# EAGLE board SSCI_SPI_LCD_P (EAGLE 7.5.0)
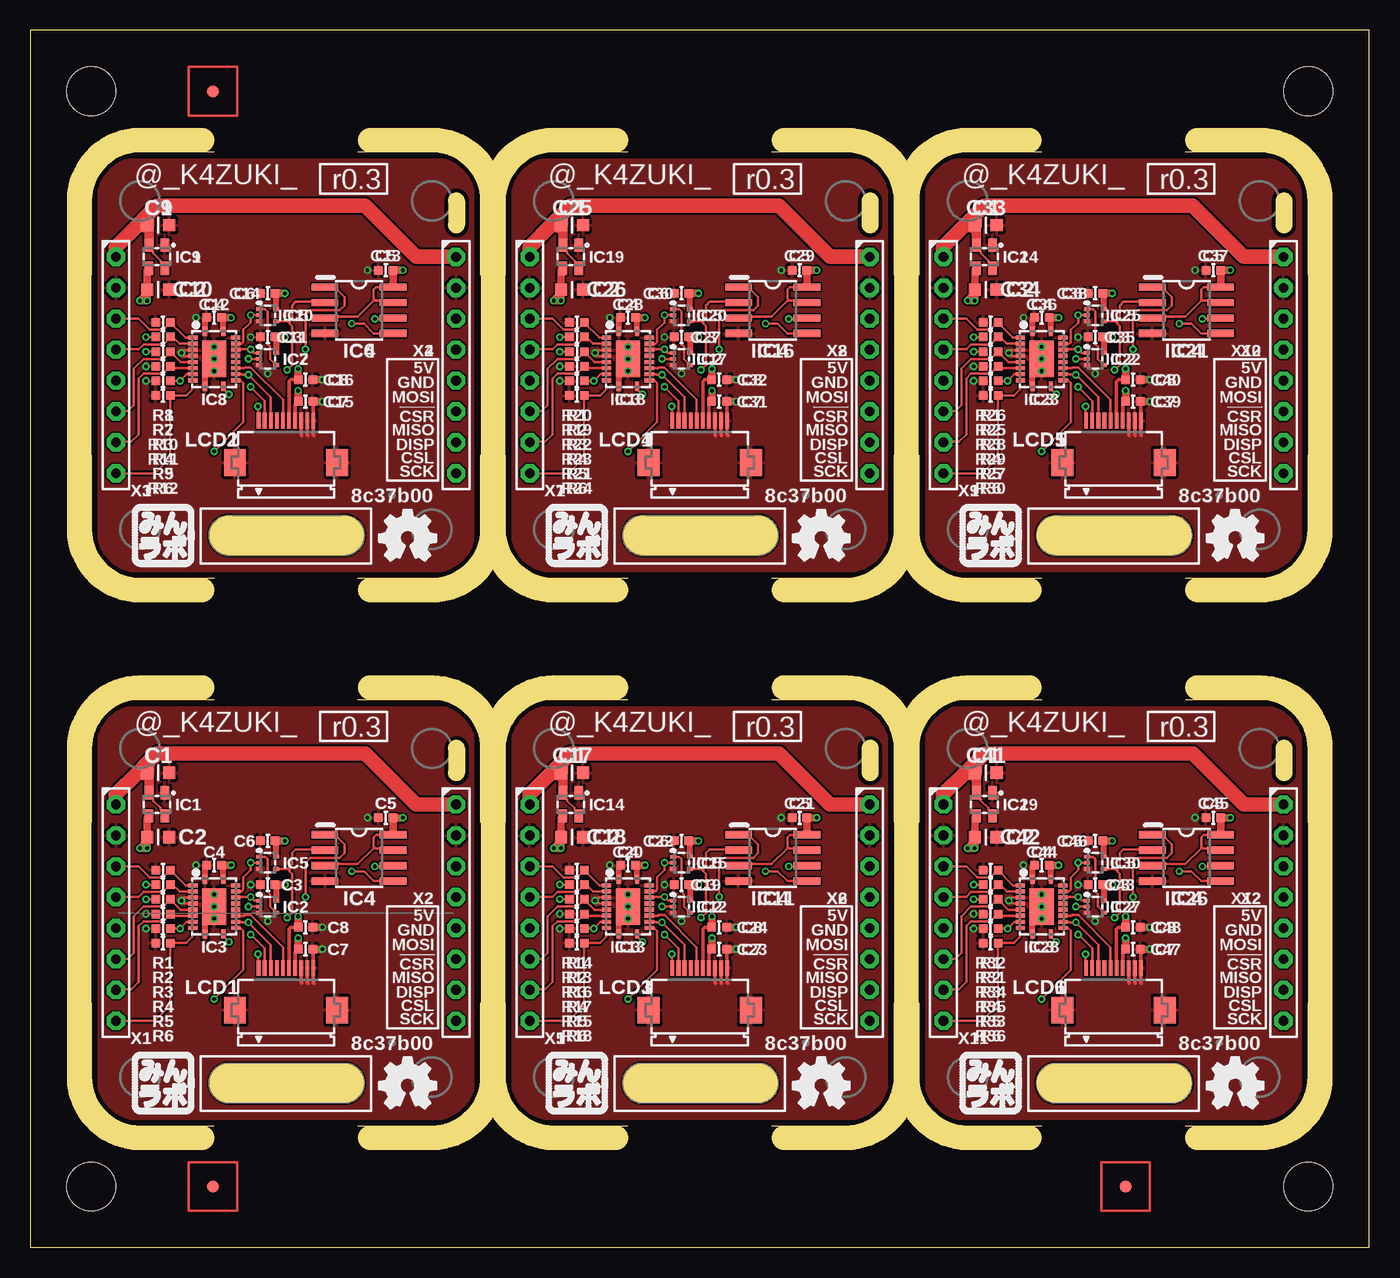
[diagram p0: board, top side]
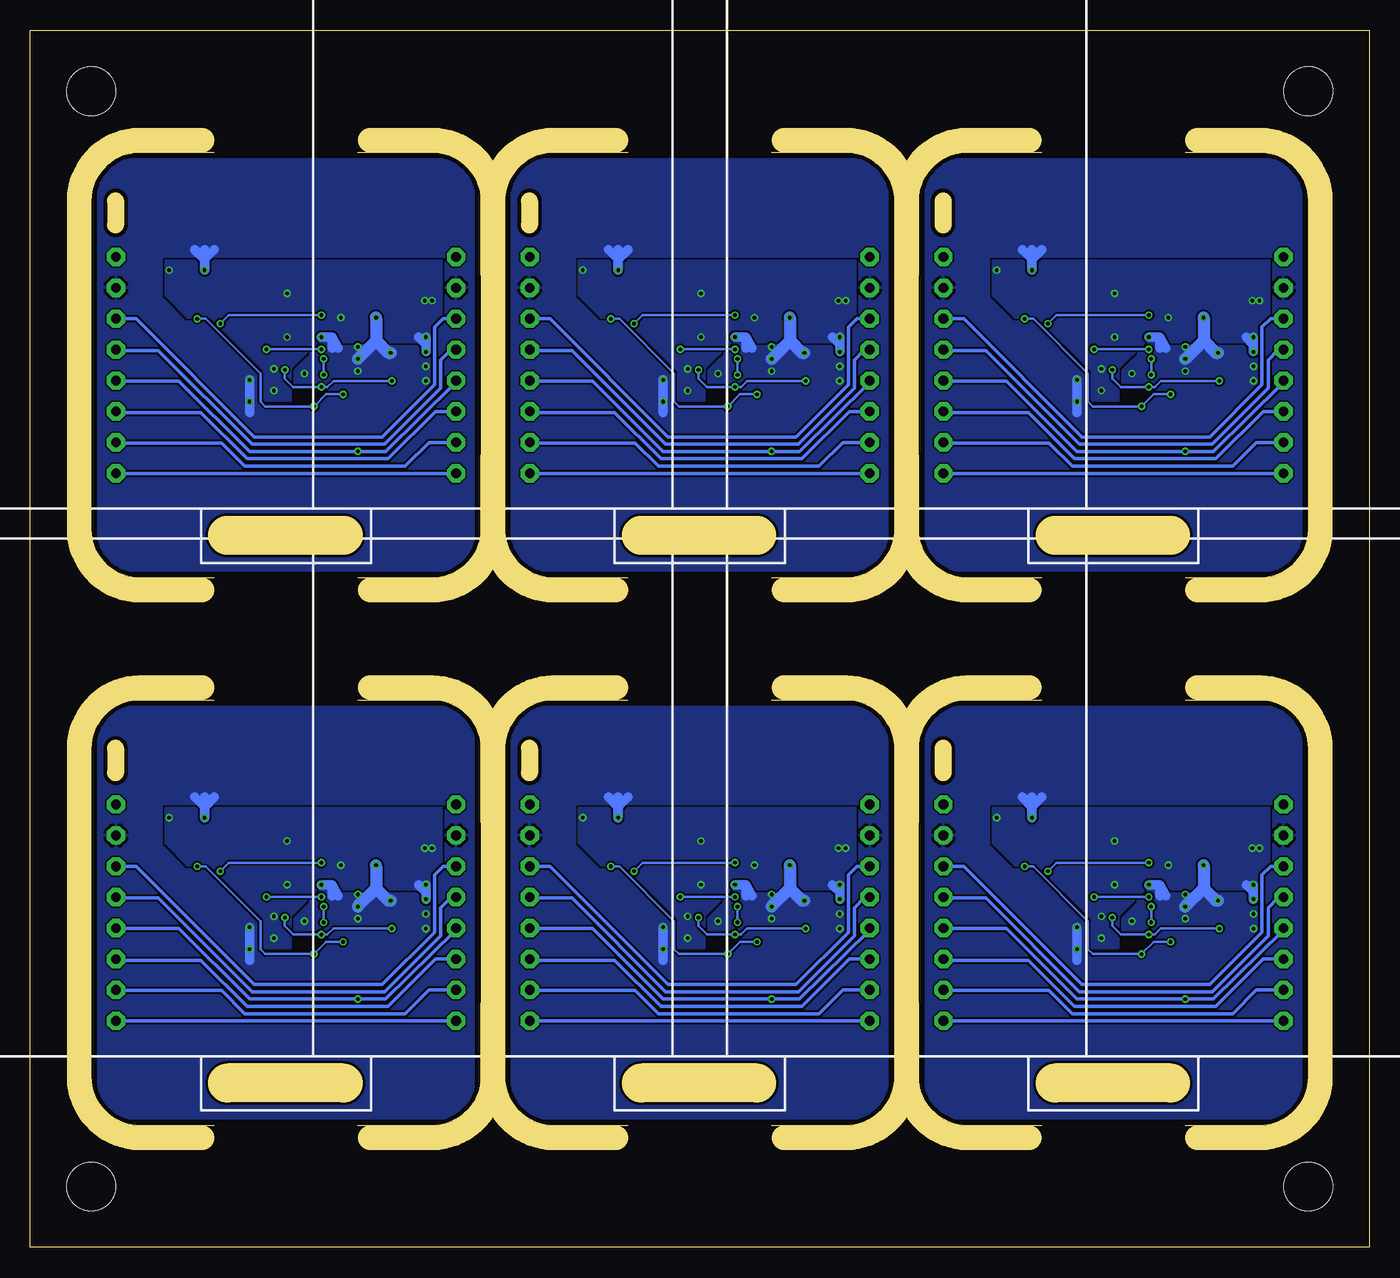
[diagram p1: board, bottom side, seen from below]

Size 110 x 100 mm. Coordinates in mm from the lower left corner, seen from the top.
Outline: 0,0 110,0 110,100 0,100 0,0
Copper layers (1*16): Top 0.035mm / dielectric 1.5mm / Bottom 0.035mm
Design rules "default": minimum track width 0.15mm, minimum drill 0.3mm, track to track 0.15mm, track to pad 0.15mm, pad to pad 0.15mm, via to via 0.15mm, smd to smd 0mil, copper to edge 0.4mm, drill to drill 8mil, minimum pad ring 0.15mm, minimum via ring 0.15mm, stop-mask expansion 4mil, vias tented up to drill 100mil, thermal gap 10mil
Holes 4 mm at 5,5 105,5 105,95 5,95
tRestrict: 108 lines
bRestrict: 30 lines
Milling: 14 lines

## Footprints (pad centres in the part's own frame; a part is rotated, then mirrored left to right if it is on the bottom)
CR_1608 = smd 1 x 1: 1 -0.9,0; 2 0.9,0
C0402 = smd 0.7 x 0.7: 1 -0.6,0; 2 0.6,0
SOT130P220X135-4N = smd 0.7 x 1.1: 1 -0.65,-0.95; 2 0.65,-0.95; 3 0.65,0.95; 4 -0.65,0.95
SOT50P160X120-5N = smd 0.3 x 0.5: 1 -0.5,-0.7; 2 0,-0.7; 3 0.5,-0.7; 4 0.5,0.7; 5 -0.5,0.7
QFN50P460X360-20N = smd 0.75 x 0.35: 1 -2.25,-0.75; 10 2.25,-0.75; 11 2.25,0.75; 20 -2.25,0.75 | smd 0.35 x 0.75: 2 -1.75,-1.75; 3 -1.25,-1.75; 4 -0.75,-1.75; 5 -0.25,-1.75; 6 0.25,-1.75; 7 0.75,-1.75; 8 1.25,-1.75; 9 1.75,-1.75; 12 1.75,1.75; 13 1.25,1.75; 14 0.75,1.75; 15 0.25,1.75; 16 -0.25,1.75; 17 -0.75,1.75; 18 -1.25,1.75; 19 -1.75,1.75 | smd 3 x 2: EP 0,0
IC_08_1.27_150MIL = smd 0.6 x 2.2: 1 -1.905,-2.8; 2 -0.635,-2.8; 3 0.635,-2.8; 4 1.905,-2.8; 5 1.905,2.8; 6 0.635,2.8; 7 -0.635,2.8 | smd 0.603 x 2.2: 8 -1.905,2.8
LCD_GLCD_400X240 = smd 0.3 x 1.3: 1 -2.25,3.45; 2 -1.75,3.45; 3 -1.25,3.45; 4 -0.75,3.45; 5 -0.25,3.45; 6 0.25,3.45; 7 0.75,3.45; 8 1.25,3.45; 9 1.75,3.45; 10 2.25,3.45 | smd 1.8 x 2.2: PAD1 4.2,0; PAD2 -4.2,0
FIDUCIAL = smd 1 x 1: TP 0,0
PHA-1X08SG = drill 0.8 pad 1.5 octagon: 1 8.89,0; 2 6.35,0; 3 3.81,0; 4 1.27,0; 5 -1.27,0; 6 -3.81,0; 7 -6.35,0; 8 -8.89,0

## Placement (x,y rotation side)
C1  [CR_1608]  10.5,39 0 top
C2  [CR_1608]  10.5,33.7 0 top
C3  [C0402]  19.5,29.8 180 top
C4  [C0402]  15.1,31.4 180 top
C5  [C0402]  29.2,35.3 180 top
C6  [C0402]  19.5,33.4 180 top
C7  [C0402]  22.6,24.5 0 top
C8  [C0402]  22.6,26.3 0 top
C9  [CR_1608]  10.5,84 0 top
C10  [CR_1608]  10.5,78.7 0 top
C11  [C0402]  19.5,74.8 180 top
C12  [C0402]  15.1,76.4 180 top
C13  [C0402]  29.2,80.3 180 top
C14  [C0402]  19.5,78.4 180 top
C15  [C0402]  22.6,69.5 0 top
C16  [C0402]  22.6,71.3 0 top
C17  [CR_1608]  44.5,39 0 top
C18  [CR_1608]  44.5,33.7 0 top
C19  [C0402]  53.5,29.8 180 top
C20  [C0402]  49.1,31.4 180 top
C21  [C0402]  63.2,35.3 180 top
C22  [C0402]  53.5,33.4 180 top
C23  [C0402]  56.6,24.5 0 top
C24  [C0402]  56.6,26.3 0 top
C25  [CR_1608]  44.5,84 0 top
C26  [CR_1608]  44.5,78.7 0 top
C27  [C0402]  53.5,74.8 180 top
C28  [C0402]  49.1,76.4 180 top
C29  [C0402]  63.2,80.3 180 top
C30  [C0402]  53.5,78.4 180 top
C31  [C0402]  56.6,69.5 0 top
C32  [C0402]  56.6,71.3 0 top
C33  [CR_1608]  78.5,84 0 top
C34  [CR_1608]  78.5,78.7 0 top
C35  [C0402]  87.5,74.8 180 top
C36  [C0402]  83.1,76.4 180 top
C37  [C0402]  97.2,80.3 180 top
C38  [C0402]  87.5,78.4 180 top
C39  [C0402]  90.6,69.5 0 top
C40  [C0402]  90.6,71.3 0 top
C41  [CR_1608]  78.5,39 0 top
C42  [CR_1608]  78.5,33.7 0 top
C43  [C0402]  87.5,29.8 180 top
C44  [C0402]  83.1,31.4 180 top
C45  [C0402]  97.2,35.3 180 top
C46  [C0402]  87.5,33.4 180 top
C47  [C0402]  90.6,24.5 0 top
C48  [C0402]  90.6,26.3 0 top
GIT1  8c37b00  [GIT-REVISION_1.2]  29.7,16.8 0 top
GIT2  8c37b00  [GIT-REVISION_1.2]  29.7,61.8 0 top
GIT3  8c37b00  [GIT-REVISION_1.2]  63.7,16.8 0 top
GIT4  8c37b00  [GIT-REVISION_1.2]  63.7,61.8 0 top
GIT5  8c37b00  [GIT-REVISION_1.2]  97.7,61.8 0 top
GIT6  8c37b00  [GIT-REVISION_1.2]  97.7,16.8 0 top
I1  [ICON_MINLAB_5.2MM]  8.4,11 0 top
I2  [ICON_MINLAB_5.2MM]  8.4,56 0 top
I3  [ICON_MINLAB_5.2MM]  42.4,11 0 top
I4  [ICON_MINLAB_5.2MM]  42.4,56 0 top
I5  [ICON_MINLAB_5.2MM]  76.4,56 0 top
I6  [ICON_MINLAB_5.2MM]  76.4,11 0 top
IC1  [SOT130P220X135-4N]  10.4,36.4 180 top
IC2  [SOT50P160X120-5N]  19.5,28 270 top
IC3  74LVC541_RGY  [QFN50P460X360-20N]  15.1,28 270 top
IC4  [IC_08_1.27_150MIL]  27,32 270 top
IC5  [SOT50P160X120-5N]  19.5,31.6 270 top
IC6  [IC_08_1.27_150MIL]  27,77 270 top
IC7  [SOT50P160X120-5N]  19.5,73 270 top
IC8  74LVC541_RGY  [QFN50P460X360-20N]  15.1,73 270 top
IC9  [SOT130P220X135-4N]  10.4,81.4 180 top
IC10  [SOT50P160X120-5N]  19.5,76.6 270 top
IC11  [IC_08_1.27_150MIL]  61,32 270 top
IC12  [SOT50P160X120-5N]  53.5,28 270 top
IC13  74LVC541_RGY  [QFN50P460X360-20N]  49.1,28 270 top
IC14  [SOT130P220X135-4N]  44.4,36.4 180 top
IC15  [SOT50P160X120-5N]  53.5,31.6 270 top
IC16  [IC_08_1.27_150MIL]  61,77 270 top
IC17  [SOT50P160X120-5N]  53.5,73 270 top
IC18  74LVC541_RGY  [QFN50P460X360-20N]  49.1,73 270 top
IC19  [SOT130P220X135-4N]  44.4,81.4 180 top
IC20  [SOT50P160X120-5N]  53.5,76.6 270 top
IC21  [IC_08_1.27_150MIL]  95,77 270 top
IC22  [SOT50P160X120-5N]  87.5,73 270 top
IC23  74LVC541_RGY  [QFN50P460X360-20N]  83.1,73 270 top
IC24  [SOT130P220X135-4N]  78.4,81.4 180 top
IC25  [SOT50P160X120-5N]  87.5,76.6 270 top
IC26  [IC_08_1.27_150MIL]  95,32 270 top
IC27  [SOT50P160X120-5N]  87.5,28 270 top
IC28  74LVC541_RGY  [QFN50P460X360-20N]  83.1,28 270 top
IC29  [SOT130P220X135-4N]  78.4,36.4 180 top
IC30  [SOT50P160X120-5N]  87.5,31.6 270 top
ICON1  r0.3  [ICON_REVISION1.7]  26.9,42.8 0 top
ICON2  [ICON_OSHW]  31,13.3 0 top
ICON3  r0.3  [ICON_REVISION1.7]  26.9,87.8 0 top
ICON4  [ICON_OSHW]  31,58.3 0 top
ICON5  r0.3  [ICON_REVISION1.7]  60.9,42.8 0 top
ICON6  [ICON_OSHW]  65,13.3 0 top
ICON7  r0.3  [ICON_REVISION1.7]  60.9,87.8 0 top
ICON8  [ICON_OSHW]  65,58.3 0 top
ICON9  r0.3  [ICON_REVISION1.7]  94.9,87.8 0 top
ICON10  [ICON_OSHW]  99,58.3 0 top
ICON11  r0.3  [ICON_REVISION1.7]  94.9,42.8 0 top
ICON12  [ICON_OSHW]  99,13.3 0 top
LCD1  LCD_GLCD_400X240  [LCD_GLCD_400X240]  21,19.5 0 top
LCD2  LCD_GLCD_400X240  [LCD_GLCD_400X240]  21,64.5 0 top
LCD3  LCD_GLCD_400X240  [LCD_GLCD_400X240]  55,19.5 0 top
LCD4  LCD_GLCD_400X240  [LCD_GLCD_400X240]  55,64.5 0 top
LCD5  LCD_GLCD_400X240  [LCD_GLCD_400X240]  89,64.5 0 top
LCD6  LCD_GLCD_400X240  [LCD_GLCD_400X240]  89,19.5 0 top
P1  [PCB_CORNER_NH]  33,14 0 top
P2  [PCB_CORNER_NH]  33,41 90 top
P3  [PCB_CORNER_NH]  9,41 180 top
P4  [PCB_CORNER_NH]  9,14 270 top
P5  [PCB_CORNER_NH]  33,59 0 top
P6  [PCB_CORNER_NH]  33,86 90 top
P7  [PCB_CORNER_NH]  9,86 180 top
P8  [PCB_CORNER_NH]  9,59 270 top
P9  [PCB_CORNER_NH]  67,14 0 top
P10  [PCB_CORNER_NH]  67,41 90 top
P11  [PCB_CORNER_NH]  43,41 180 top
P12  [PCB_CORNER_NH]  43,14 270 top
P13  [PCB_CORNER_NH]  67,59 0 top
P14  [PCB_CORNER_NH]  67,86 90 top
P15  [PCB_CORNER_NH]  43,86 180 top
P16  [PCB_CORNER_NH]  43,59 270 top
P17  [PCB_CORNER_NH]  101,59 0 top
P18  [PCB_CORNER_NH]  101,86 90 top
P19  [PCB_CORNER_NH]  77,86 180 top
P20  [PCB_CORNER_NH]  77,59 270 top
P21  [PCB_CORNER_NH]  101,14 0 top
P22  [PCB_CORNER_NH]  101,41 90 top
P23  [PCB_CORNER_NH]  77,41 180 top
P24  [PCB_CORNER_NH]  77,14 270 top
R1  [C0402]  10.9,31 0 top
R2  [C0402]  10.9,29.8 0 top
R3  [C0402]  10.9,28.6 0 top
R4  [C0402]  10.9,27.4 0 top
R5  [C0402]  10.9,26.2 0 top
R6  [C0402]  10.9,25 0 top
R7  [C0402]  10.9,74.8 0 top
R8  [C0402]  10.9,76 0 top
R9  [C0402]  10.9,71.2 0 top
R10  [C0402]  10.9,73.6 0 top
R11  [C0402]  10.9,72.4 0 top
R12  [C0402]  10.9,70 0 top
R13  [C0402]  44.9,29.8 0 top
R14  [C0402]  44.9,31 0 top
R15  [C0402]  44.9,26.2 0 top
R16  [C0402]  44.9,28.6 0 top
R17  [C0402]  44.9,27.4 0 top
R18  [C0402]  44.9,25 0 top
R19  [C0402]  44.9,74.8 0 top
R20  [C0402]  44.9,76 0 top
R21  [C0402]  44.9,71.2 0 top
R22  [C0402]  44.9,73.6 0 top
R23  [C0402]  44.9,72.4 0 top
R24  [C0402]  44.9,70 0 top
R25  [C0402]  78.9,74.8 0 top
R26  [C0402]  78.9,76 0 top
R27  [C0402]  78.9,71.2 0 top
R28  [C0402]  78.9,73.6 0 top
R29  [C0402]  78.9,72.4 0 top
R30  [C0402]  78.9,70 0 top
R31  [C0402]  78.9,29.8 0 top
R32  [C0402]  78.9,31 0 top
R33  [C0402]  78.9,26.2 0 top
R34  [C0402]  78.9,28.6 0 top
R35  [C0402]  78.9,27.4 0 top
R36  [C0402]  78.9,25 0 top
TP1  [FIDUCIAL]  15,5 0 top
TP2  [FIDUCIAL]  90,5 0 top
TP3  [FIDUCIAL]  15,95 0 top
X1  PHA-1X08SG  [PHA-1X08SG]  7.03,27.5 90 top
X2  PHA-1X08SG  [PHA-1X08SG]  34.97,27.5 90 top
X3  PHA-1X08SG  [PHA-1X08SG]  7.03,72.5 90 top
X4  PHA-1X08SG  [PHA-1X08SG]  34.97,72.5 90 top
X5  PHA-1X08SG  [PHA-1X08SG]  41.03,27.5 90 top
X6  PHA-1X08SG  [PHA-1X08SG]  68.97,27.5 90 top
X7  PHA-1X08SG  [PHA-1X08SG]  41.03,72.5 90 top
X8  PHA-1X08SG  [PHA-1X08SG]  68.97,72.5 90 top
X9  PHA-1X08SG  [PHA-1X08SG]  75.03,72.5 90 top
X10  PHA-1X08SG  [PHA-1X08SG]  102.97,72.5 90 top
X11  PHA-1X08SG  [PHA-1X08SG]  75.03,27.5 90 top
X12  PHA-1X08SG  [PHA-1X08SG]  102.97,27.5 90 top

## Library data of the parts
C1 C2 C9 C10 C17 C18 C25 C26 C33 C34 C41 C42 = mylib; DIGIKEY: 445-11238-1-ND; SMD_PAD: 2
C3-C8 C11-C16 C19-C24 C27-C32 C35-C40 C43-C48 = mylib; DIGIKEY: 490-3261-1-ND; SEEED: 302010024; SMD_PAD: 2
GIT1-GIT6 = git-revision; NOT_COMPONENT: YES
I1-I6 ICON1-ICON12 P1-P24 TP1-TP3 = mylib; NOT_COMPONENT: YES
IC1 IC9 IC14 IC19 IC24 IC29 = mylib; MOUSER: 863-NCP562SQ33T1G
IC2 IC7 IC12 IC17 IC22 IC27 = mylib; MOUSER: 595-SN74LVC1G00DRLR
IC3 IC8 IC13 IC18 IC23 IC28 = mylib; MOUSER: 595-SN74LVC541ARGYR
IC4 IC6 IC11 IC16 IC21 IC26 = mylib; DIGIKEY: 23K256T-I/SNCT-ND; MOUSER: 579-23K256T-I/SN
IC5 IC10 IC15 IC20 IC25 IC30 = mylib; MOUSER: 595-SN74LVC1G125DRLR
LCD1-LCD6 = mylib; DIGIKEY: HFJ110CT-ND; MOUSER: 798-FH12-10S-0.5SH55
R1 R8 R14 R20 R26 R32 = mylib; DIGIKEY: P10.0KLCT-ND; NOT_COMPONENT: YES; SEEED: 301010047; SMD_PAD: 2
R2-R7 R9-R13 R15-R19 R21-R25 R27-R31 R33-R36 = mylib; DIGIKEY: P10.0KLCT-ND; SEEED: 301010047; SMD_PAD: 2
X1-X12 = mylib; AKIZUKI: C-04394

## Nets
3.3V: C2.1 C3.1 C4.1 C5.1 C6.1 C7.1 C8.1 IC1.3 IC2.5 IC3.20 IC4.3 IC4.7 IC4.8 IC5.5 LCD1.6 LCD1.7 R2.1 R3.1
3.3V1: C10.1 C11.1 C12.1 C13.1 C14.1 C15.1 C16.1 IC6.3 IC6.7 IC6.8 IC7.5 IC8.20 IC9.3 IC10.5 LCD2.6 LCD2.7 R7.1 R10.1
3.3V2: C18.1 C19.1 C20.1 C21.1 C22.1 C23.1 C24.1 IC11.3 IC11.7 IC11.8 IC12.5 IC13.20 IC14.3 IC15.5 LCD3.6 LCD3.7 R13.1 R16.1
3.3V3: C26.1 C27.1 C28.1 C29.1 C30.1 C31.1 C32.1 IC16.3 IC16.7 IC16.8 IC17.5 IC18.20 IC19.3 IC20.5 LCD4.6 LCD4.7 R19.1 R22.1
3.3V4: C34.1 C35.1 C36.1 C37.1 C38.1 C39.1 C40.1 IC21.3 IC21.7 IC21.8 IC22.5 IC23.20 IC24.3 IC25.5 LCD5.6 LCD5.7 R25.1 R28.1
3.3V5: C42.1 C43.1 C44.1 C45.1 C46.1 C47.1 C48.1 IC26.3 IC26.7 IC26.8 IC27.5 IC28.20 IC29.3 IC30.5 LCD6.6 LCD6.7 R31.1 R34.1
5V: C1.1 IC1.2 IC1.4 X1.1 X2.1
5V1: C9.1 IC9.2 IC9.4 X3.1 X4.1
5V2: C17.1 IC14.2 IC14.4 X5.1 X6.1
5V3: C25.1 IC19.2 IC19.4 X7.1 X8.1
5V4: C33.1 IC24.2 IC24.4 X9.1 X10.1
5V5: C41.1 IC29.2 IC29.4 X11.1 X12.1
!CSR!: IC3.3 R2.2 X1.4 X2.4
!CSR!1: IC8.3 R7.2 X3.4 X4.4
!CSR!2: IC13.3 R13.2 X5.4 X6.4
!CSR!3: IC18.3 R19.2 X7.4 X8.4
!CSR!4: IC23.3 R25.2 X9.4 X10.4
!CSR!5: IC28.3 R31.2 X11.4 X12.4
!CSR!-: IC2.1 IC3.17 IC4.1
!CSR!-1: IC6.1 IC7.1 IC8.17
!CSR!-2: IC11.1 IC12.1 IC13.17
!CSR!-3: IC16.1 IC17.1 IC18.17
!CSR!-4: IC21.1 IC22.1 IC23.17
!CSR!-5: IC26.1 IC27.1 IC28.17
CSL: IC3.7 R4.2 X1.7 X2.7
CSL1: IC8.7 R11.2 X3.7 X4.7
CSL2: IC13.7 R17.2 X5.7 X6.7
CSL3: IC18.7 R23.2 X7.7 X8.7
CSL4: IC23.7 R29.2 X9.7 X10.7
CSL5: IC28.7 R35.2 X11.7 X12.7
CSL-: IC2.2 IC3.13 LCD1.3
CSL-1: IC7.2 IC8.13 LCD2.3
CSL-2: IC12.2 IC13.13 LCD3.3
CSL-3: IC17.2 IC18.13 LCD4.3
CSL-4: IC22.2 IC23.13 LCD5.3
CSL-5: IC27.2 IC28.13 LCD6.3
DISP: IC3.6 R3.2 X1.6 X2.6
DISP1: IC8.6 R10.2 X3.6 X4.6
DISP2: IC13.6 R16.2 X5.6 X6.6
DISP3: IC18.6 R22.2 X7.6 X8.6
DISP4: IC23.6 R28.2 X9.6 X10.6
DISP5: IC28.6 R34.2 X11.6 X12.6
DISP-: IC3.14 LCD1.5
DISP-1: IC8.14 LCD2.5
DISP-2: IC13.14 LCD3.5
DISP-3: IC18.14 LCD4.5
DISP-4: IC23.14 LCD5.5
DISP-5: IC28.14 LCD6.5
GND: C1.2 C2.2 C3.2 C4.2 C5.2 C6.2 C7.2 C8.2 IC1.1 IC2.3 IC3.1 IC3.4 IC3.5 IC3.10 IC3.19 IC3.EP IC4.4 IC5.3 LCD1.8 LCD1.9 LCD1.10 LCD1.PAD1 LCD1.PAD2 R1.1 R4.1 R5.1 R6.1 X1.2 X2.2
GND1: C9.2 C10.2 C11.2 C12.2 C13.2 C14.2 C15.2 C16.2 IC6.4 IC7.3 IC8.1 IC8.4 IC8.5 IC8.10 IC8.19 IC8.EP IC9.1 IC10.3 LCD2.8 LCD2.9 LCD2.10 LCD2.PAD1 LCD2.PAD2 R8.1 R9.1 R11.1 R12.1 X3.2 X4.2
GND2: C17.2 C18.2 C19.2 C20.2 C21.2 C22.2 C23.2 C24.2 IC11.4 IC12.3 IC13.1 IC13.4 IC13.5 IC13.10 IC13.19 IC13.EP IC14.1 IC15.3 LCD3.8 LCD3.9 LCD3.10 LCD3.PAD1 LCD3.PAD2 R14.1 R15.1 R17.1 R18.1 X5.2 X6.2
GND3: C25.2 C26.2 C27.2 C28.2 C29.2 C30.2 C31.2 C32.2 IC16.4 IC17.3 IC18.1 IC18.4 IC18.5 IC18.10 IC18.19 IC18.EP IC19.1 IC20.3 LCD4.8 LCD4.9 LCD4.10 LCD4.PAD1 LCD4.PAD2 R20.1 R21.1 R23.1 R24.1 X7.2 X8.2
GND4: C33.2 C34.2 C35.2 C36.2 C37.2 C38.2 C39.2 C40.2 IC21.4 IC22.3 IC23.1 IC23.4 IC23.5 IC23.10 IC23.19 IC23.EP IC24.1 IC25.3 LCD5.8 LCD5.9 LCD5.10 LCD5.PAD1 LCD5.PAD2 R26.1 R27.1 R29.1 R30.1 X9.2 X10.2
GND5: C41.2 C42.2 C43.2 C44.2 C45.2 C46.2 C47.2 C48.2 IC26.4 IC27.3 IC28.1 IC28.4 IC28.5 IC28.10 IC28.19 IC28.EP IC29.1 IC30.3 LCD6.8 LCD6.9 LCD6.10 LCD6.PAD1 LCD6.PAD2 R32.1 R33.1 R35.1 R36.1 X11.2 X12.2
MISO: IC3.12 X1.5 X2.5
MISO1: IC8.12 X3.5 X4.5
MISO2: IC13.12 X5.5 X6.5
MISO3: IC18.12 X7.5 X8.5
MISO4: IC23.12 X9.5 X10.5
MISO5: IC28.12 X11.5 X12.5
MISO-: IC3.8 IC4.2 IC5.4 LCD1.2 R5.2
MISO-1: IC6.2 IC8.8 IC10.4 LCD2.2 R9.2
MISO-2: IC11.2 IC13.8 IC15.4 LCD3.2 R15.2
MISO-3: IC16.2 IC18.8 IC20.4 LCD4.2 R21.2
MISO-4: IC21.2 IC23.8 IC25.4 LCD5.2 R27.2
MISO-5: IC26.2 IC28.8 IC30.4 LCD6.2 R33.2
MOSI: IC3.2 R1.2 X1.3 X2.3
MOSI1: IC8.2 R8.2 X3.3 X4.3
MOSI2: IC13.2 R14.2 X5.3 X6.3
MOSI3: IC18.2 R20.2 X7.3 X8.3
MOSI4: IC23.2 R26.2 X9.3 X10.3
MOSI5: IC28.2 R32.2 X11.3 X12.3
MOSI-: IC3.18 IC4.5 IC5.2
MOSI-1: IC6.5 IC8.18 IC10.2
MOSI-2: IC11.5 IC13.18 IC15.2
MOSI-3: IC16.5 IC18.18 IC20.2
MOSI-4: IC21.5 IC23.18 IC25.2
MOSI-5: IC26.5 IC28.18 IC30.2
N$1: IC7.4 IC10.1
N$2: IC2.4 IC5.1
N$3: IC12.4 IC15.1
N$4: IC17.4 IC20.1
N$5: IC22.4 IC25.1
N$6: IC27.4 IC30.1
SCK: IC3.9 R6.2 X1.8 X2.8
SCK1: IC8.9 R12.2 X3.8 X4.8
SCK2: IC13.9 R18.2 X5.8 X6.8
SCK3: IC18.9 R24.2 X7.8 X8.8
SCK4: IC23.9 R30.2 X9.8 X10.8
SCK5: IC28.9 R36.2 X11.8 X12.8
SCK-: IC3.11 IC4.6 LCD1.1
SCK-1: IC6.6 IC8.11 LCD2.1
SCK-2: IC11.6 IC13.11 LCD3.1
SCK-3: IC16.6 IC18.11 LCD4.1
SCK-4: IC21.6 IC23.11 LCD5.1
SCK-5: IC26.6 IC28.11 LCD6.1

## Tracks (layer width: path | path; a pad name or v marks a point on that pad's centre or on a via)
3.3V  (via drill 0.3)
  Top 0.2: 20.2,28.6 IC2.5 | 20.2,32.2 IC5.5 | IC4.7 28.96,32.63 28.8,32.8 28.4,32.8 | 28.4,32.8 28.2,32.8 | IC4.3 25.07,31.36 25.2,31.5 26.9,31.5 28.2,32.8 | IC4.8 28.41,33.91 28.2,33.7 28.2,33 | 28.2,33 28.2,32.8 | R2.1 v9.5,29.8 | 28.2,33 28.4,32.8 | v9.5,28.6 R3.1
  Top 0.3: LCD1.6 21.25,26.15 21.4,26.3 C8.1 | LCD1.7 21.75,24.25 C7.1
  Top 0.5: C3.1 20.2,29.7 20.2,28.6 | 20.2,32.2 20.2,33.3 C6.1 | IC3.20 15.85,31.25 C4.1
  Top 0.6: IC4.8 C5.1 v30.6,35.3 | v22,25.4 C7.1 | v22,27.2 C8.1 | v20.9,29.8 C3.1 | C6.1 v20.9,33.4 | C4.1 v16.5,31.4 | IC1.3 9.6,35.3 C2.1 9.6,33.4 | 9.6,33.4 v9.6,32.8 v9,32.8 9.6,33.4
  Bottom 0.8: v9.5,28.6 9.5,29.2 | 9.5,29.2 v9.5,29.8 | 9.5,29.2 10.1,29.8
  pour Bottom: 8.2,36.1 30.9,36.1 30.9,33.2 29.1,31.4 27.2,31.4 22.8,27 22.8,24.6 20.6,24.6 20.6,27.2 18.4,29.4 8.2,29.4
3.3V1  (via drill 0.3)
  Top 0.2: 20.2,73.6 IC7.5 | 20.2,77.2 IC10.5 | IC6.7 28.96,77.64 28.8,77.8 28.4,77.8 | 28.4,77.8 28.2,77.8 | IC6.3 25.07,76.36 25.2,76.5 26.9,76.5 28.2,77.8 | IC6.8 28.41,78.91 28.2,78.7 28.2,78 | 28.2,78 28.2,77.8 | R7.1 v9.5,74.8 | 28.2,78 28.4,77.8 | v9.5,73.6 R10.1
  Top 0.3: LCD2.6 21.25,71.15 21.4,71.3 C16.1 | LCD2.7 21.75,69.25 C15.1
  Top 0.5: C11.1 20.2,74.7 20.2,73.6 | 20.2,77.2 20.2,78.3 C14.1 | IC8.20 15.85,76.25 C12.1
  Top 0.6: IC6.8 C13.1 v30.6,80.3 | v22,70.4 C15.1 | v22,72.2 C16.1 | v20.9,74.8 C11.1 | C14.1 v20.9,78.4 | C12.1 v16.5,76.4 | IC9.3 9.6,80.3 C10.1 9.6,78.4 | 9.6,78.4 v9.6,77.8 v9,77.8 9.6,78.4
  Bottom 0.8: v9.5,73.6 9.5,74.2 | 9.5,74.2 v9.5,74.8 | 9.5,74.2 10.1,74.8
  pour Bottom: 8.2,81.1 30.9,81.1 30.9,78.2 29.1,76.4 27.2,76.4 22.8,72 22.8,69.6 20.6,69.6 20.6,72.2 18.4,74.4 8.2,74.4
3.3V2  (via drill 0.3)
  Top 0.2: 54.2,28.6 IC12.5 | 54.2,32.2 IC15.5 | IC11.7 62.97,32.63 62.8,32.8 62.4,32.8 | 62.4,32.8 62.2,32.8 | IC11.3 59.06,31.36 59.2,31.5 60.9,31.5 62.2,32.8 | IC11.8 62.41,33.91 62.2,33.7 62.2,33 | 62.2,33 62.2,32.8 | R13.1 v43.5,29.8 | 62.2,33 62.4,32.8 | v43.5,28.6 R16.1
  Top 0.3: LCD3.6 55.25,26.15 55.4,26.3 C24.1 | LCD3.7 55.75,24.25 C23.1
  Top 0.5: C19.1 54.2,29.7 54.2,28.6 | 54.2,32.2 54.2,33.3 C22.1 | IC13.20 49.85,31.25 C20.1
  Top 0.6: IC11.8 C21.1 v64.6,35.3 | v56,25.4 C23.1 | v56,27.2 C24.1 | v54.9,29.8 C19.1 | C22.1 v54.9,33.4 | C20.1 v50.5,31.4 | IC14.3 43.6,35.3 C18.1 43.6,33.4 | 43.6,33.4 v43.6,32.8 v43,32.8 43.6,33.4
  Bottom 0.8: v43.5,28.6 43.5,29.2 | 43.5,29.2 v43.5,29.8 | 43.5,29.2 44.1,29.8
  pour Bottom: 42.2,36.1 64.9,36.1 64.9,33.2 63.1,31.4 61.2,31.4 56.8,27 56.8,24.6 54.6,24.6 54.6,27.2 52.4,29.4 42.2,29.4
3.3V3  (via drill 0.3)
  Top 0.2: 54.2,73.6 IC17.5 | 54.2,77.2 IC20.5 | IC16.7 62.97,77.64 62.8,77.8 62.4,77.8 | 62.4,77.8 62.2,77.8 | IC16.3 59.06,76.36 59.2,76.5 60.9,76.5 62.2,77.8 | IC16.8 62.41,78.91 62.2,78.7 62.2,78 | 62.2,78 62.2,77.8 | R19.1 v43.5,74.8 | 62.2,78 62.4,77.8 | v43.5,73.6 R22.1
  Top 0.3: LCD4.6 55.25,71.15 55.4,71.3 C32.1 | LCD4.7 55.75,69.25 C31.1
  Top 0.5: C27.1 54.2,74.7 54.2,73.6 | 54.2,77.2 54.2,78.3 C30.1 | IC18.20 49.85,76.25 C28.1
  Top 0.6: IC16.8 C29.1 v64.6,80.3 | v56,70.4 C31.1 | v56,72.2 C32.1 | v54.9,74.8 C27.1 | C30.1 v54.9,78.4 | C28.1 v50.5,76.4 | IC19.3 43.6,80.3 C26.1 43.6,78.4 | 43.6,78.4 v43.6,77.8 v43,77.8 43.6,78.4
  Bottom 0.8: v43.5,73.6 43.5,74.2 | 43.5,74.2 v43.5,74.8 | 43.5,74.2 44.1,74.8
  pour Bottom: 42.2,81.1 64.9,81.1 64.9,78.2 63.1,76.4 61.2,76.4 56.8,72 56.8,69.6 54.6,69.6 54.6,72.2 52.4,74.4 42.2,74.4
3.3V4  (via drill 0.3)
  Top 0.2: 88.2,73.6 IC22.5 | 88.2,77.2 IC25.5 | IC21.7 96.97,77.64 96.8,77.8 96.4,77.8 | 96.4,77.8 96.2,77.8 | IC21.3 93.06,76.36 93.2,76.5 94.9,76.5 96.2,77.8 | IC21.8 96.41,78.91 96.2,78.7 96.2,78 | 96.2,78 96.2,77.8 | R25.1 v77.5,74.8 | 96.2,78 96.4,77.8 | v77.5,73.6 R28.1
  Top 0.3: LCD5.6 89.25,71.15 89.4,71.3 C40.1 | LCD5.7 89.75,69.25 C39.1
  Top 0.5: C35.1 88.2,74.7 88.2,73.6 | 88.2,77.2 88.2,78.3 C38.1 | IC23.20 83.85,76.25 C36.1
  Top 0.6: IC21.8 C37.1 v98.6,80.3 | v90,70.4 C39.1 | v90,72.2 C40.1 | v88.9,74.8 C35.1 | C38.1 v88.9,78.4 | C36.1 v84.5,76.4 | IC24.3 77.6,80.3 C34.1 77.6,78.4 | 77.6,78.4 v77.6,77.8 v77,77.8 77.6,78.4
  Bottom 0.8: v77.5,73.6 77.5,74.2 | 77.5,74.2 v77.5,74.8 | 77.5,74.2 78.1,74.8
  pour Bottom: 76.2,81.1 98.9,81.1 98.9,78.2 97.1,76.4 95.2,76.4 90.8,72 90.8,69.6 88.6,69.6 88.6,72.2 86.4,74.4 76.2,74.4
3.3V5  (via drill 0.3)
  Top 0.2: 88.2,28.6 IC27.5 | 88.2,32.2 IC30.5 | IC26.7 96.97,32.63 96.8,32.8 96.4,32.8 | 96.4,32.8 96.2,32.8 | IC26.3 93.06,31.36 93.2,31.5 94.9,31.5 96.2,32.8 | IC26.8 96.41,33.91 96.2,33.7 96.2,33 | 96.2,33 96.2,32.8 | R31.1 v77.5,29.8 | 96.2,33 96.4,32.8 | v77.5,28.6 R34.1
  Top 0.3: LCD6.6 89.25,26.15 89.4,26.3 C48.1 | LCD6.7 89.75,24.25 C47.1
  Top 0.5: C43.1 88.2,29.7 88.2,28.6 | 88.2,32.2 88.2,33.3 C46.1 | IC28.20 83.85,31.25 C44.1
  Top 0.6: IC26.8 C45.1 v98.6,35.3 | v90,25.4 C47.1 | v90,27.2 C48.1 | v88.9,29.8 C43.1 | C46.1 v88.9,33.4 | C44.1 v84.5,31.4 | IC29.3 77.6,35.3 C42.1 77.6,33.4 | 77.6,33.4 v77.6,32.8 v77,32.8 77.6,33.4
  Bottom 0.8: v77.5,28.6 77.5,29.2 | 77.5,29.2 v77.5,29.8 | 77.5,29.2 78.1,29.8
  pour Bottom: 76.2,36.1 98.9,36.1 98.9,33.2 97.1,31.4 95.2,31.4 90.8,27 90.8,24.6 88.6,24.6 88.6,27.2 86.4,29.4 76.2,29.4
5V
  Top 0.2: IC1.2 9.75,37.15 10.1,36.8 10.1,36.7 10.7,36.1 10.7,36 11.05,35.65 IC1.4
  Top 0.6: 8.8,39 9.1,39 9.7,38.4
  Top 0.8: IC1.2 9.75,38.85 C1.1
  Top 1.2: 8.8,39 7,37.2 7,36.4 X1.1 | 8.8,39 C1.1 9.6,39.8 | 9.6,39.8 10.4,40.6 27.5,40.6 31.7,36.4 X2.1 | 8.8,39 9.6,39.8
5V1
  Top 0.2: IC9.2 9.75,82.15 10.1,81.8 10.1,81.7 10.7,81.1 10.7,81 11.05,80.65 IC9.4
  Top 0.6: 8.8,84 9.1,84 9.7,83.4
  Top 0.8: IC9.2 9.75,83.85 C9.1
  Top 1.2: 8.8,84 7,82.2 7,81.4 X3.1 | 8.8,84 C9.1 9.6,84.8 | 9.6,84.8 10.4,85.6 27.5,85.6 31.7,81.4 X4.1 | 8.8,84 9.6,84.8
5V2
  Top 0.2: IC14.2 43.75,37.15 44.1,36.8 44.1,36.7 44.7,36.1 44.7,36 45.05,35.65 IC14.4
  Top 0.6: 42.8,39 43.1,39 43.7,38.4
  Top 0.8: IC14.2 43.75,38.85 C17.1
  Top 1.2: 42.8,39 41,37.2 41,36.4 X5.1 | 42.8,39 C17.1 43.6,39.8 | 43.6,39.8 44.4,40.6 61.5,40.6 65.7,36.4 X6.1 | 42.8,39 43.6,39.8
5V3
  Top 0.2: IC19.2 43.75,82.15 44.1,81.8 44.1,81.7 44.7,81.1 44.7,81 45.05,80.65 IC19.4
  Top 0.6: 42.8,84 43.1,84 43.7,83.4
  Top 0.8: IC19.2 43.75,83.85 C25.1
  Top 1.2: 42.8,84 41,82.2 41,81.4 X7.1 | 42.8,84 C25.1 43.6,84.8 | 43.6,84.8 44.4,85.6 61.5,85.6 65.7,81.4 X8.1 | 42.8,84 43.6,84.8
5V4
  Top 0.2: IC24.2 77.75,82.15 78.1,81.8 78.1,81.7 78.7,81.1 78.7,81 79.05,80.65 IC24.4
  Top 0.6: 76.8,84 77.1,84 77.7,83.4
  Top 0.8: IC24.2 77.75,83.85 C33.1
  Top 1.2: 76.8,84 75,82.2 75,81.4 X9.1 | 76.8,84 C33.1 77.6,84.8 | 77.6,84.8 78.4,85.6 95.5,85.6 99.7,81.4 X10.1 | 76.8,84 77.6,84.8
5V5
  Top 0.2: IC29.2 77.75,37.15 78.1,36.8 78.1,36.7 78.7,36.1 78.7,36 79.05,35.65 IC29.4
  Top 0.6: 76.8,39 77.1,39 77.7,38.4
  Top 0.8: IC29.2 77.75,38.85 C41.1
  Top 1.2: 76.8,39 75,37.2 75,36.4 X11.1 | 76.8,39 C41.1 77.6,39.8 | 77.6,39.8 78.4,40.6 95.5,40.6 99.7,36.4 X12.1 | 76.8,39 77.6,39.8
!CSR!
  Top 0.2: IC3.3 12.25,29.25 11.7,29.8 R2.2 10.9,29.2 9.3,29.2 8.9,28.8 7.02,28.8 X1.4
  Bottom 0.3: X2.4 35.04,28.7 31.5,28.7 23.8,21 12.9,21 8.3,25.6 8.3,27.9 7.49,28.71 7.09,28.71 X1.4
!CSR!1
  Top 0.2: IC8.3 12.25,74.25 11.7,74.8 R7.2 10.9,74.2 9.3,74.2 8.9,73.8 7.02,73.8 X3.4
  Bottom 0.3: X4.4 35.04,73.7 31.5,73.7 23.8,66 12.9,66 8.3,70.6 8.3,72.9 7.49,73.71 7.09,73.71 X3.4
!CSR!2
  Top 0.2: IC13.3 46.25,29.25 45.7,29.8 R13.2 44.9,29.2 43.3,29.2 42.9,28.8 41.02,28.8 X5.4
  Bottom 0.3: X6.4 69.04,28.7 65.5,28.7 57.8,21 46.9,21 42.3,25.6 42.3,27.9 41.49,28.71 41.09,28.71 X5.4
!CSR!3
  Top 0.2: IC18.3 46.25,74.25 45.7,74.8 R19.2 44.9,74.2 43.3,74.2 42.9,73.8 41.02,73.8 X7.4
  Bottom 0.3: X8.4 69.04,73.7 65.5,73.7 57.8,66 46.9,66 42.3,70.6 42.3,72.9 41.49,73.71 41.09,73.71 X7.4
!CSR!4
  Top 0.2: IC23.3 80.25,74.25 79.7,74.8 R25.2 78.9,74.2 77.3,74.2 76.9,73.8 75.02,73.8 X9.4
  Bottom 0.3: X10.4 103.04,73.7 99.5,73.7 91.8,66 80.9,66 76.3,70.6 76.3,72.9 75.49,73.71 75.09,73.71 X9.4
!CSR!5
  Top 0.2: IC28.3 80.25,29.25 79.7,29.8 R31.2 78.9,29.2 77.3,29.2 76.9,28.8 75.02,28.8 X11.4
  Bottom 0.3: X12.4 103.04,28.7 99.5,28.7 91.8,21 80.9,21 76.3,25.6 76.3,27.9 75.49,28.71 75.09,28.71 X11.4
!CSR!-  (via drill 0.3)
  Top 0.2: IC3.17 17.25,28.75 17.3,28.8 v18.1,28.8 18.4,28.5 IC2.1 | IC4.1 24.2,33.8 25.1,33.8 25.8,33.1 25.8,32.4 25.4,32 23,32 22.6,31.6 v22.6,28.8
  Bottom 0.2: v18.1,28.8 v22.6,28.8
!CSR!-1  (via drill 0.3)
  Top 0.2: IC8.17 17.25,73.75 17.3,73.8 v18.1,73.8 18.4,73.5 IC7.1 | IC6.1 24.2,78.8 25.1,78.8 25.8,78.1 25.8,77.4 25.4,77 23,77 22.6,76.6 v22.6,73.8
  Bottom 0.2: v18.1,73.8 v22.6,73.8
!CSR!-2  (via drill 0.3)
  Top 0.2: IC13.17 51.25,28.75 51.3,28.8 v52.1,28.8 52.4,28.5 IC12.1 | IC11.1 58.2,33.8 59.1,33.8 59.8,33.1 59.8,32.4 59.4,32 57,32 56.6,31.6 v56.6,28.8
  Bottom 0.2: v52.1,28.8 v56.6,28.8
!CSR!-3  (via drill 0.3)
  Top 0.2: IC18.17 51.25,73.75 51.3,73.8 v52.1,73.8 52.4,73.5 IC17.1 | IC16.1 58.2,78.8 59.1,78.8 59.8,78.1 59.8,77.4 59.4,77 57,77 56.6,76.6 v56.6,73.8
  Bottom 0.2: v52.1,73.8 v56.6,73.8
!CSR!-4  (via drill 0.3)
  Top 0.2: IC23.17 85.25,73.75 85.3,73.8 v86.1,73.8 86.4,73.5 IC22.1 | IC21.1 92.2,78.8 93.1,78.8 93.8,78.1 93.8,77.4 93.4,77 91,77 90.6,76.6 v90.6,73.8
  Bottom 0.2: v86.1,73.8 v90.6,73.8
!CSR!-5  (via drill 0.3)
  Top 0.2: IC28.17 85.25,28.75 85.3,28.8 v86.1,28.8 86.4,28.5 IC27.1 | IC26.1 92.2,33.8 93.1,33.8 93.8,33.1 93.8,32.4 93.4,32 91,32 90.6,31.6 v90.6,28.8
  Bottom 0.2: v86.1,28.8 v90.6,28.8
CSL
  Top 0.2: IC3.7 11.65,27.25 R4.2 10.9,26.8 9.3,26.8 8.9,26.4 8.9,21.8 8.3,21.2 7.04,21.2 X1.7
  Bottom 0.3: X2.7 35,21.1 26.3,21.1 24.4,19.2 11.2,19.2 9.25,21.15 X1.7
CSL1
  Top 0.2: IC8.7 11.65,72.25 R11.2 10.9,71.8 9.3,71.8 8.9,71.4 8.9,66.8 8.3,66.2 7.04,66.2 X3.7
  Bottom 0.3: X4.7 35,66.1 26.3,66.1 24.4,64.2 11.2,64.2 9.25,66.15 X3.7
CSL2
  Top 0.2: IC13.7 45.65,27.25 R17.2 44.9,26.8 43.3,26.8 42.9,26.4 42.9,21.8 42.3,21.2 41.04,21.2 X5.7
  Bottom 0.3: X6.7 69,21.1 60.3,21.1 58.4,19.2 45.2,19.2 43.25,21.15 X5.7
CSL3
  Top 0.2: IC18.7 45.65,72.25 R23.2 44.9,71.8 43.3,71.8 42.9,71.4 42.9,66.8 42.3,66.2 41.04,66.2 X7.7
  Bottom 0.3: X8.7 69,66.1 60.3,66.1 58.4,64.2 45.2,64.2 43.25,66.15 X7.7
CSL4
  Top 0.2: IC23.7 79.65,72.25 R29.2 78.9,71.8 77.3,71.8 76.9,71.4 76.9,66.8 76.3,66.2 75.04,66.2 X9.7
  Bottom 0.3: X10.7 103,66.1 94.3,66.1 92.4,64.2 79.2,64.2 77.25,66.15 X9.7
CSL5
  Top 0.2: IC28.7 79.65,27.25 R35.2 78.9,26.8 77.3,26.8 76.9,26.4 76.9,21.8 76.3,21.2 75.04,21.2 X11.7
  Bottom 0.3: X12.7 103,21.1 94.3,21.1 92.4,19.2 79.2,19.2 77.25,21.15 X11.7
CSL-  (via drill 0.3)
  Top 0.2: LCD1.3 19.75,24.85 v17.9,26.7 17.4,26.7 17.35,26.75 IC3.13 | IC2.2 v17.9,28
  Bottom 0.2: v17.9,28 v17.9,26.7
CSL-1  (via drill 0.3)
  Top 0.2: LCD2.3 19.75,69.85 v17.9,71.7 17.4,71.7 17.35,71.75 IC8.13 | IC7.2 v17.9,73
  Bottom 0.2: v17.9,73 v17.9,71.7
CSL-2  (via drill 0.3)
  Top 0.2: LCD3.3 53.75,24.85 v51.9,26.7 51.4,26.7 51.35,26.75 IC13.13 | IC12.2 v51.9,28
  Bottom 0.2: v51.9,28 v51.9,26.7
CSL-3  (via drill 0.3)
  Top 0.2: LCD4.3 53.75,69.85 v51.9,71.7 51.4,71.7 51.35,71.75 IC18.13 | IC17.2 v51.9,73
  Bottom 0.2: v51.9,73 v51.9,71.7
CSL-4  (via drill 0.3)
  Top 0.2: LCD5.3 87.75,69.85 v85.9,71.7 85.4,71.7 85.35,71.75 IC23.13 | IC22.2 v85.9,73
  Bottom 0.2: v85.9,73 v85.9,71.7
CSL-5  (via drill 0.3)
  Top 0.2: LCD6.3 87.75,24.85 v85.9,26.7 85.4,26.7 85.35,26.75 IC28.13 | IC27.2 v85.9,28
  Bottom 0.2: v85.9,28 v85.9,26.7
DISP
  Top 0.2: IC3.6 12.35,27.75 R3.2 10.9,28 9.3,28 8.5,27.2 8.5,24.2 8,23.7 7.1,23.7 X1.6
  Bottom 0.3: X2.6 35,23.6 28,23.6 24.2,19.8 12.6,19.8 8.71,23.69 X1.6
DISP1
  Top 0.2: IC8.6 12.35,72.75 R10.2 10.9,73 9.3,73 8.5,72.2 8.5,69.2 8,68.7 7.1,68.7 X3.6
  Bottom 0.3: X4.6 35,68.6 28,68.6 24.2,64.8 12.6,64.8 8.71,68.69 X3.6
DISP2
  Top 0.2: IC13.6 46.35,27.75 R16.2 44.9,28 43.3,28 42.5,27.2 42.5,24.2 42,23.7 41.1,23.7 X5.6
  Bottom 0.3: X6.6 69,23.6 62,23.6 58.2,19.8 46.6,19.8 42.71,23.69 X5.6
DISP3
  Top 0.2: IC18.6 46.35,72.75 R22.2 44.9,73 43.3,73 42.5,72.2 42.5,69.2 42,68.7 41.1,68.7 X7.6
  Bottom 0.3: X8.6 69,68.6 62,68.6 58.2,64.8 46.6,64.8 42.71,68.69 X7.6
DISP4
  Top 0.2: IC23.6 80.35,72.75 R28.2 78.9,73 77.3,73 76.5,72.2 76.5,69.2 76,68.7 75.1,68.7 X9.6
  Bottom 0.3: X10.6 103,68.6 96,68.6 92.2,64.8 80.6,64.8 76.71,68.69 X9.6
DISP5
  Top 0.2: IC28.6 80.35,27.75 R34.2 78.9,28 77.3,28 76.5,27.2 76.5,24.2 76,23.7 75.1,23.7 X11.6
  Bottom 0.3: X12.6 103,23.6 96,23.6 92.2,19.8 80.6,19.8 76.71,23.69 X11.6
DISP-
  Top 0.2: LCD1.5 20.75,24.65 18.1,27.3 17.6,27.3 17.55,27.25 IC3.14
DISP-1
  Top 0.2: LCD2.5 20.75,69.65 18.1,72.3 17.6,72.3 17.55,72.25 IC8.14
DISP-2
  Top 0.2: LCD3.5 54.75,24.65 52.1,27.3 51.6,27.3 51.55,27.25 IC13.14
DISP-3
  Top 0.2: LCD4.5 54.75,69.65 52.1,72.3 51.6,72.3 51.55,72.25 IC18.14
DISP-4
  Top 0.2: LCD5.5 88.75,69.65 86.1,72.3 85.6,72.3 85.55,72.25 IC23.14
DISP-5
  Top 0.2: LCD6.5 88.75,24.65 86.1,27.3 85.6,27.3 85.55,27.25 IC28.14
GND  (via drill 0.3)
  Top 0.2: IC3.4 12.65,28.75 v12.4,28.5 12.65,28.25 IC3.5
  Top 0.3: LCD1.8 22.25,21.75 22.3,21.7 | LCD1.9 22.75,21.75 22.8,21.7 | C7.2 23.25,24.45 LCD1.10 23.25,21.75 23.3,21.7
  Top 0.5: IC3.1 14.35,31.25 C4.2 | IC3.10 14.35,26.95 14.4,27 v15.1,27
  Top 0.6: v24,24.5 C7.2 | v24,26.3 C8.2
  Bottom 0.8: v18.1,29.8 17.2,29.8 | v24,26.3 v24,24.5 24,23.6 | 17.2,29.8 17.2,28.9 | 17.2,29.8 16.7,28.9 | 27.7,37 27.7,36.2 | 27.7,36.2 v27.7,35.3 | 27.7,36.2 26.9,37 | 27.7,36.2 28.5,37
  Bottom 1: v13.6,31.4 13.6,29.5 | 13.6,29.5 IC3.EP | 13.6,29.5 12.6,28.5 v12.4,28.5
  other vias: 19.5,26.8 9.5,26.2 9.5,27.4 15.1,28 15.1,29
  pour Top: 5,45 37,45 37,10 5,10
  pour Bottom (rank 2): 5,45 37,45 37,10 5,10
GND1  (via drill 0.3)
  Top 0.2: IC8.4 12.65,73.75 v12.4,73.5 12.65,73.25 IC8.5
  Top 0.3: LCD2.8 22.25,66.75 22.3,66.7 | LCD2.9 22.75,66.75 22.8,66.7 | C15.2 23.25,69.45 LCD2.10 23.25,66.75 23.3,66.7
  Top 0.5: IC8.1 14.35,76.25 C12.2 | IC8.10 14.35,71.95 14.4,72 v15.1,72
  Top 0.6: v24,69.5 C15.2 | v24,71.3 C16.2
  Bottom 0.8: v18.1,74.8 17.2,74.8 | v24,71.3 v24,69.5 24,68.6 | 17.2,74.8 17.2,73.9 | 17.2,74.8 16.7,73.9 | 27.7,82 27.7,81.2 | 27.7,81.2 v27.7,80.3 | 27.7,81.2 26.9,82 | 27.7,81.2 28.5,82
  Bottom 1: v13.6,76.4 13.6,74.5 | 13.6,74.5 IC8.EP | 13.6,74.5 12.6,73.5 v12.4,73.5
  other vias: 19.5,71.8 9.5,71.2 9.5,72.4 15.1,73 15.1,74
  pour Top: 5,90 37,90 37,55 5,55
  pour Bottom (rank 2): 5,90 37,90 37,55 5,55
GND2  (via drill 0.3)
  Top 0.2: IC13.4 46.65,28.75 v46.4,28.5 46.65,28.25 IC13.5
  Top 0.3: LCD3.8 56.25,21.75 56.3,21.7 | LCD3.9 56.75,21.75 56.8,21.7 | C23.2 57.25,24.45 LCD3.10 57.25,21.75 57.3,21.7
  Top 0.5: IC13.1 48.35,31.25 C20.2 | IC13.10 48.35,26.95 48.4,27 v49.1,27
  Top 0.6: v58,24.5 C23.2 | v58,26.3 C24.2
  Bottom 0.8: v52.1,29.8 51.2,29.8 | v58,26.3 v58,24.5 58,23.6 | 51.2,29.8 51.2,28.9 | 51.2,29.8 50.7,28.9 | 61.7,37 61.7,36.2 | 61.7,36.2 v61.7,35.3 | 61.7,36.2 60.9,37 | 61.7,36.2 62.5,37
  Bottom 1: v47.6,31.4 47.6,29.5 | 47.6,29.5 IC13.EP | 47.6,29.5 46.6,28.5 v46.4,28.5
  other vias: 53.5,26.8 43.5,26.2 43.5,27.4 49.1,28 49.1,29
  pour Top: 39,45 71,45 71,10 39,10
  pour Bottom (rank 2): 39,45 71,45 71,10 39,10
GND3  (via drill 0.3)
  Top 0.2: IC18.4 46.65,73.75 v46.4,73.5 46.65,73.25 IC18.5
  Top 0.3: LCD4.8 56.25,66.75 56.3,66.7 | LCD4.9 56.75,66.75 56.8,66.7 | C31.2 57.25,69.45 LCD4.10 57.25,66.75 57.3,66.7
  Top 0.5: IC18.1 48.35,76.25 C28.2 | IC18.10 48.35,71.95 48.4,72 v49.1,72
  Top 0.6: v58,69.5 C31.2 | v58,71.3 C32.2
  Bottom 0.8: v52.1,74.8 51.2,74.8 | v58,71.3 v58,69.5 58,68.6 | 51.2,74.8 51.2,73.9 | 51.2,74.8 50.7,73.9 | 61.7,82 61.7,81.2 | 61.7,81.2 v61.7,80.3 | 61.7,81.2 60.9,82 | 61.7,81.2 62.5,82
  Bottom 1: v47.6,76.4 47.6,74.5 | 47.6,74.5 IC18.EP | 47.6,74.5 46.6,73.5 v46.4,73.5
  other vias: 53.5,71.8 43.5,71.2 43.5,72.4 49.1,73 49.1,74
  pour Top: 39,90 71,90 71,55 39,55
  pour Bottom (rank 2): 39,90 71,90 71,55 39,55
GND4  (via drill 0.3)
  Top 0.2: IC23.4 80.65,73.75 v80.4,73.5 80.65,73.25 IC23.5
  Top 0.3: LCD5.8 90.25,66.75 90.3,66.7 | LCD5.9 90.75,66.75 90.8,66.7 | C39.2 91.25,69.45 LCD5.10 91.25,66.75 91.3,66.7
  Top 0.5: IC23.1 82.35,76.25 C36.2 | IC23.10 82.35,71.95 82.4,72 v83.1,72
  Top 0.6: v92,69.5 C39.2 | v92,71.3 C40.2
  Bottom 0.8: v86.1,74.8 85.2,74.8 | v92,71.3 v92,69.5 92,68.6 | 85.2,74.8 85.2,73.9 | 85.2,74.8 84.7,73.9 | 95.7,82 95.7,81.2 | 95.7,81.2 v95.7,80.3 | 95.7,81.2 94.9,82 | 95.7,81.2 96.5,82
  Bottom 1: v81.6,76.4 81.6,74.5 | 81.6,74.5 IC23.EP | 81.6,74.5 80.6,73.5 v80.4,73.5
  other vias: 87.5,71.8 77.5,71.2 77.5,72.4 83.1,73 83.1,74
  pour Top: 73,90 105,90 105,55 73,55
  pour Bottom (rank 2): 73,90 105,90 105,55 73,55
GND5  (via drill 0.3)
  Top 0.2: IC28.4 80.65,28.75 v80.4,28.5 80.65,28.25 IC28.5
  Top 0.3: LCD6.8 90.25,21.75 90.3,21.7 | LCD6.9 90.75,21.75 90.8,21.7 | C47.2 91.25,24.45 LCD6.10 91.25,21.75 91.3,21.7
  Top 0.5: IC28.1 82.35,31.25 C44.2 | IC28.10 82.35,26.95 82.4,27 v83.1,27
  Top 0.6: v92,24.5 C47.2 | v92,26.3 C48.2
  Bottom 0.8: v86.1,29.8 85.2,29.8 | v92,26.3 v92,24.5 92,23.6 | 85.2,29.8 85.2,28.9 | 85.2,29.8 84.7,28.9 | 95.7,37 95.7,36.2 | 95.7,36.2 v95.7,35.3 | 95.7,36.2 94.9,37 | 95.7,36.2 96.5,37
  Bottom 1: v81.6,31.4 81.6,29.5 | 81.6,29.5 IC28.EP | 81.6,29.5 80.6,28.5 v80.4,28.5
  other vias: 87.5,26.8 77.5,26.2 77.5,27.4 83.1,28 83.1,29
  pour Top: 73,45 105,45 105,10 73,10
  pour Bottom (rank 2): 73,45 105,45 105,10 73,10
MISO  (via drill 0.3)
  Top 0.2: IC3.12 17.25,26.25 17.5,26 17.5,22.8 v15.1,20.4
  Bottom 0.3: X2.5 35,26.2 29.8,26.2 24,20.4 v15.1,20.4 12.8,20.4 7.1,26 6.97,26.13 X1.5
MISO1  (via drill 0.3)
  Top 0.2: IC8.12 17.25,71.25 17.5,71 17.5,67.8 v15.1,65.4
  Bottom 0.3: X4.5 35,71.2 29.8,71.2 24,65.4 v15.1,65.4 12.8,65.4 7.1,71 6.97,71.13 X3.5
MISO2  (via drill 0.3)
  Top 0.2: IC13.12 51.25,26.25 51.5,26 51.5,22.8 v49.1,20.4
  Bottom 0.3: X6.5 69,26.2 63.8,26.2 58,20.4 v49.1,20.4 46.8,20.4 41.1,26 40.97,26.13 X5.5
MISO3  (via drill 0.3)
  Top 0.2: IC18.12 51.25,71.25 51.5,71 51.5,67.8 v49.1,65.4
  Bottom 0.3: X8.5 69,71.2 63.8,71.2 58,65.4 v49.1,65.4 46.8,65.4 41.1,71 40.97,71.13 X7.5
MISO4  (via drill 0.3)
  Top 0.2: IC23.12 85.25,71.25 85.5,71 85.5,67.8 v83.1,65.4
  Bottom 0.3: X10.5 103,71.2 97.8,71.2 92,65.4 v83.1,65.4 80.8,65.4 75.1,71 74.97,71.13 X9.5
MISO5  (via drill 0.3)
  Top 0.2: IC28.12 85.25,26.25 85.5,26 85.5,22.8 v83.1,20.4
  Bottom 0.3: X12.5 103,26.2 97.8,26.2 92,20.4 v83.1,20.4 80.8,20.4 75.1,26 74.97,26.13 X11.5
MISO-  (via drill 0.3)
  Top 0.2: IC3.8 12.85,26.75 v12.3,26.2 R5.2 | LCD1.2 19.25,24.55 v18.1,25.7 | IC4.2 23.36,32.63 23.3,32.7 21.8,32.7 21.5,32.4 21.5,31.5 21.3,31.3 | 21.3,31.3 21.1,31.1 | 21.1,31.1 21.3,30.9 | 21.3,30.9 21.5,30.7 21.5,27.5 v21.1,27.1 | IC5.4 21.1,31.1 | 21.3,31.3 21.3,30.9
  Bottom 0.2: v12.3,26.2 17.1,26.2 17.6,25.7 v18.1,25.7 20.4,25.7 21.1,26.4 v21.1,27.1
MISO-1  (via drill 0.3)
  Top 0.2: IC8.8 12.85,71.75 v12.3,71.2 R9.2 | LCD2.2 19.25,69.55 v18.1,70.7 | IC6.2 23.36,77.64 23.3,77.7 21.8,77.7 21.5,77.4 21.5,76.5 21.3,76.3 | 21.3,76.3 21.1,76.1 | 21.1,76.1 21.3,75.9 | 21.3,75.9 21.5,75.7 21.5,72.5 v21.1,72.1 | IC10.4 21.1,76.1 | 21.3,76.3 21.3,75.9
  Bottom 0.2: v12.3,71.2 17.1,71.2 17.6,70.7 v18.1,70.7 20.4,70.7 21.1,71.4 v21.1,72.1
MISO-2  (via drill 0.3)
  Top 0.2: IC13.8 46.85,26.75 v46.3,26.2 R15.2 | LCD3.2 53.25,24.55 v52.1,25.7 | IC11.2 57.37,32.63 57.3,32.7 55.8,32.7 55.5,32.4 55.5,31.5 55.3,31.3 | 55.3,31.3 55.1,31.1 | 55.1,31.1 55.3,30.9 | 55.3,30.9 55.5,30.7 55.5,27.5 v55.1,27.1 | IC15.4 55.1,31.1 | 55.3,31.3 55.3,30.9
  Bottom 0.2: v46.3,26.2 51.1,26.2 51.6,25.7 v52.1,25.7 54.4,25.7 55.1,26.4 v55.1,27.1
MISO-3  (via drill 0.3)
  Top 0.2: IC18.8 46.85,71.75 v46.3,71.2 R21.2 | LCD4.2 53.25,69.55 v52.1,70.7 | IC16.2 57.37,77.64 57.3,77.7 55.8,77.7 55.5,77.4 55.5,76.5 55.3,76.3 | 55.3,76.3 55.1,76.1 | 55.1,76.1 55.3,75.9 | 55.3,75.9 55.5,75.7 55.5,72.5 v55.1,72.1 | IC20.4 55.1,76.1 | 55.3,76.3 55.3,75.9
  Bottom 0.2: v46.3,71.2 51.1,71.2 51.6,70.7 v52.1,70.7 54.4,70.7 55.1,71.4 v55.1,72.1
MISO-4  (via drill 0.3)
  Top 0.2: IC23.8 80.85,71.75 v80.3,71.2 R27.2 | LCD5.2 87.25,69.55 v86.1,70.7 | IC21.2 91.36,77.64 91.3,77.7 89.8,77.7 89.5,77.4 89.5,76.5 89.3,76.3 | 89.3,76.3 89.1,76.1 | 89.1,76.1 89.3,75.9 | 89.3,75.9 89.5,75.7 89.5,72.5 v89.1,72.1 | IC25.4 89.1,76.1 | 89.3,76.3 89.3,75.9
  Bottom 0.2: v80.3,71.2 85.1,71.2 85.6,70.7 v86.1,70.7 88.4,70.7 89.1,71.4 v89.1,72.1
MISO-5  (via drill 0.3)
  Top 0.2: IC28.8 80.85,26.75 v80.3,26.2 R33.2 | LCD6.2 87.25,24.55 v86.1,25.7 | IC26.2 91.36,32.63 91.3,32.7 89.8,32.7 89.5,32.4 89.5,31.5 89.3,31.3 | 89.3,31.3 89.1,31.1 | 89.1,31.1 89.3,30.9 | 89.3,30.9 89.5,30.7 89.5,27.5 v89.1,27.1 | IC30.4 89.1,31.1 | 89.3,31.3 89.3,30.9
  Bottom 0.2: v80.3,26.2 85.1,26.2 85.6,25.7 v86.1,25.7 88.4,25.7 89.1,26.4 v89.1,27.1
MOSI
  Top 0.2: IC3.2 12.75,29.75 R1.2 10.9,30.4 9.8,30.4 8.9,31.3 7.1,31.3 X1.3
  Bottom 0.3: X2.3 35,31.3 33.3,31.3 23.6,21.6 13.1,21.6 8.8,25.9 8.8,30.6 8.09,31.31 X1.3
MOSI1
  Top 0.2: IC8.2 12.75,74.75 R8.2 10.9,75.4 9.8,75.4 8.9,76.3 7.1,76.3 X3.3
  Bottom 0.3: X4.3 35,76.3 33.3,76.3 23.6,66.6 13.1,66.6 8.8,70.9 8.8,75.6 8.09,76.31 X3.3
MOSI2
  Top 0.2: IC13.2 46.75,29.75 R14.2 44.9,30.4 43.8,30.4 42.9,31.3 41.1,31.3 X5.3
  Bottom 0.3: X6.3 69,31.3 67.3,31.3 57.6,21.6 47.1,21.6 42.8,25.9 42.8,30.6 42.09,31.31 X5.3
MOSI3
  Top 0.2: IC18.2 46.75,74.75 R20.2 44.9,75.4 43.8,75.4 42.9,76.3 41.1,76.3 X7.3
  Bottom 0.3: X8.3 69,76.3 67.3,76.3 57.6,66.6 47.1,66.6 42.8,70.9 42.8,75.6 42.09,76.31 X7.3
MOSI4
  Top 0.2: IC23.2 80.75,74.75 R26.2 78.9,75.4 77.8,75.4 76.9,76.3 75.1,76.3 X9.3
  Bottom 0.3: X10.3 103,76.3 101.3,76.3 91.6,66.6 81.1,66.6 76.8,70.9 76.8,75.6 76.09,76.31 X9.3
MOSI5
  Top 0.2: IC28.2 80.75,29.75 R32.2 78.9,30.4 77.8,30.4 76.9,31.3 75.1,31.3 X11.3
  Bottom 0.3: X12.3 103,31.3 101.3,31.3 91.6,21.6 81.1,21.6 76.8,25.9 76.8,30.6 76.09,31.31 X11.3
MOSI-  (via drill 0.3)
  Top 0.2: IC3.18 17.35,29.25 17.5,29.4 17.5,30.4 18.1,31 v18.1,31.6 IC5.2 | IC4.5 28.2,30.1 27.4,30.9 v26.4,30.9
  Bottom 0.2: v18.1,31.6 25.7,31.6 v26.4,30.9
MOSI-1  (via drill 0.3)
  Top 0.2: IC8.18 17.35,74.25 17.5,74.4 17.5,75.4 18.1,76 v18.1,76.6 IC10.2 | IC6.5 28.2,75.1 27.4,75.9 v26.4,75.9
  Bottom 0.2: v18.1,76.6 25.7,76.6 v26.4,75.9
MOSI-2  (via drill 0.3)
  Top 0.2: IC13.18 51.35,29.25 51.5,29.4 51.5,30.4 52.1,31 v52.1,31.6 IC15.2 | IC11.5 62.2,30.1 61.4,30.9 v60.4,30.9
  Bottom 0.2: v52.1,31.6 59.7,31.6 v60.4,30.9
MOSI-3  (via drill 0.3)
  Top 0.2: IC18.18 51.35,74.25 51.5,74.4 51.5,75.4 52.1,76 v52.1,76.6 IC20.2 | IC16.5 62.2,75.1 61.4,75.9 v60.4,75.9
  Bottom 0.2: v52.1,76.6 59.7,76.6 v60.4,75.9
MOSI-4  (via drill 0.3)
  Top 0.2: IC23.18 85.35,74.25 85.5,74.4 85.5,75.4 86.1,76 v86.1,76.6 IC25.2 | IC21.5 96.2,75.1 95.4,75.9 v94.4,75.9
  Bottom 0.2: v86.1,76.6 93.7,76.6 v94.4,75.9
MOSI-5  (via drill 0.3)
  Top 0.2: IC28.18 85.35,29.25 85.5,29.4 85.5,30.4 86.1,31 v86.1,31.6 IC30.2 | IC26.5 96.2,30.1 95.4,30.9 v94.4,30.9
  Bottom 0.2: v86.1,31.6 93.7,31.6 v94.4,30.9
N$1
  Top 0.2: IC10.1 19.3,77.1 19.5,76.9 19.5,74.2 19.7,74 19.7,73 IC7.4
N$2
  Top 0.2: IC5.1 19.3,32.1 19.5,31.9 19.5,29.2 19.7,29 19.7,28 IC2.4
N$3
  Top 0.2: IC15.1 53.3,32.1 53.5,31.9 53.5,29.2 53.7,29 53.7,28 IC12.4
N$4
  Top 0.2: IC20.1 53.3,77.1 53.5,76.9 53.5,74.2 53.7,74 53.7,73 IC17.4
N$5
  Top 0.2: IC25.1 87.3,77.1 87.5,76.9 87.5,74.2 87.7,74 87.7,73 IC22.4
N$6
  Top 0.2: IC30.1 87.3,32.1 87.5,31.9 87.5,29.2 87.7,29 87.7,28 IC27.4
SCK
  Top 0.2: IC3.9 13.3,26.2 13.3,25.5 12.8,25 R6.2 11.5,19.9 10.2,18.6 7.1,18.6 X1.8
  Bottom 0.3: X2.8 35,18.6 7.1,18.6 X1.8
SCK1
  Top 0.2: IC8.9 13.3,71.2 13.3,70.5 12.8,70 R12.2 11.5,64.9 10.2,63.6 7.1,63.6 X3.8
  Bottom 0.3: X4.8 35,63.6 7.1,63.6 X3.8
SCK2
  Top 0.2: IC13.9 47.3,26.2 47.3,25.5 46.8,25 R18.2 45.5,19.9 44.2,18.6 41.1,18.6 X5.8
  Bottom 0.3: X6.8 69,18.6 41.1,18.6 X5.8
SCK3
  Top 0.2: IC18.9 47.3,71.2 47.3,70.5 46.8,70 R24.2 45.5,64.9 44.2,63.6 41.1,63.6 X7.8
  Bottom 0.3: X8.8 69,63.6 41.1,63.6 X7.8
SCK4
  Top 0.2: IC23.9 81.3,71.2 81.3,70.5 80.8,70 R30.2 79.5,64.9 78.2,63.6 75.1,63.6 X9.8
  Bottom 0.3: X10.8 103,63.6 75.1,63.6 X9.8
SCK5
  Top 0.2: IC28.9 81.3,26.2 81.3,25.5 80.8,25 R36.2 79.5,19.9 78.2,18.6 75.1,18.6 X11.8
  Bottom 0.3: X12.8 103,18.6 75.1,18.6 X11.8
SCK-  (via drill 0.3)
  Top 0.2: IC3.11 15.9,25.7 15.9,25.5 v16.3,25.1 | LCD1.1 18.75,23.45 18.7,23.5 v18.7,24.1 | IC4.6 29.8,31.3 v28.3,31.3
  Bottom 0.2: v28.3,31.3 27.6,31.3 23.1,26.8 23.1,24.5 22.7,24.1 v18.7,24.1 17.7,25.1 v16.3,25.1
SCK-1  (via drill 0.3)
  Top 0.2: IC8.11 15.9,70.7 15.9,70.5 v16.3,70.1 | LCD2.1 18.75,68.45 18.7,68.5 v18.7,69.1 | IC6.6 29.8,76.3 v28.3,76.3
  Bottom 0.2: v28.3,76.3 27.6,76.3 23.1,71.8 23.1,69.5 22.7,69.1 v18.7,69.1 17.7,70.1 v16.3,70.1
SCK-2  (via drill 0.3)
  Top 0.2: IC13.11 49.9,25.7 49.9,25.5 v50.3,25.1 | LCD3.1 52.75,23.45 52.7,23.5 v52.7,24.1 | IC11.6 63.8,31.3 v62.3,31.3
  Bottom 0.2: v62.3,31.3 61.6,31.3 57.1,26.8 57.1,24.5 56.7,24.1 v52.7,24.1 51.7,25.1 v50.3,25.1
SCK-3  (via drill 0.3)
  Top 0.2: IC18.11 49.9,70.7 49.9,70.5 v50.3,70.1 | LCD4.1 52.75,68.45 52.7,68.5 v52.7,69.1 | IC16.6 63.8,76.3 v62.3,76.3
  Bottom 0.2: v62.3,76.3 61.6,76.3 57.1,71.8 57.1,69.5 56.7,69.1 v52.7,69.1 51.7,70.1 v50.3,70.1
SCK-4  (via drill 0.3)
  Top 0.2: IC23.11 83.9,70.7 83.9,70.5 v84.3,70.1 | LCD5.1 86.75,68.45 86.7,68.5 v86.7,69.1 | IC21.6 97.8,76.3 v96.3,76.3
  Bottom 0.2: v96.3,76.3 95.6,76.3 91.1,71.8 91.1,69.5 90.7,69.1 v86.7,69.1 85.7,70.1 v84.3,70.1
SCK-5  (via drill 0.3)
  Top 0.2: IC28.11 83.9,25.7 83.9,25.5 v84.3,25.1 | LCD6.1 86.75,23.45 86.7,23.5 v86.7,24.1 | IC26.6 97.8,31.3 v96.3,31.3
  Bottom 0.2: v96.3,31.3 95.6,31.3 91.1,26.8 91.1,24.5 90.7,24.1 v86.7,24.1 85.7,25.1 v84.3,25.1

## Text on the board
tPlace: @_K4ZUKI_ | @_K4ZUKI_ | @_K4ZUKI_ | 5V | 5V | 5V | GND | GND | GND | MOSI | MOSI | MOSI | !CSR! | !CSR! | !CSR! | MISO | MISO | MISO | DISP | DISP | DISP | CSL | CSL | CSL | SCK | SCK | SCK | @_K4ZUKI_ | @_K4ZUKI_ | @_K4ZUKI_ | 5V | 5V | 5V | GND | GND | GND | MOSI | MOSI | MOSI | !CSR! | !CSR! | !CSR! | MISO | MISO | MISO | DISP | DISP | DISP | CSL | CSL | CSL | SCK | SCK | SCK
_tNames: C1 | C1 | C1 | C5 | C5 | C5 | IC1 | IC1 | IC1 | C2 | C2 | C2 | C4 | C6 | C4 | C6 | C4 | C6 | IC5 | IC5 | IC5 | C3 | C3 | C3 | IC4 | X2 | IC4 | X2 | IC4 | X2 | IC2 | IC2 | IC2 | C8 | C8 | C8 | IC3 | C7 | IC3 | C7 | IC3 | C7 | R1 | R1 | R1 | R2 | LCD1 | R2 | LCD1 | R2 | LCD1 | R3 | R3 | R3 | R4 | R4 | R4 | R5 | R5 | R5 | X1 | R6 | X1 | R6 | X1 | R6 | C1 | C1 | C1 | IC1 | C5 | IC1 | C5 | IC1 | C5 | C2 | C2 | C2 | C6 | C6 | C6 | C4 | IC5 | C4 | IC5 | C4 | IC5 | C3 | C3 | C3 | IC4 | X2 | IC4 | X2 | IC4 | X2 | IC2 | IC2 | IC2 | C8 | C8 | C8 | IC3 | IC3 | IC3 | C7 | C7 | C7 | R1 | R1 | R1 | R2 | LCD1 | R2 | LCD1 | R2 | LCD1 | R3 | R3 | R3 | R4 | R4 | R4 | R5 | R5 | R5 | X1 | R6 | X1 | R6 | X1 | R6